# Altium PCB pcb.PcbDoc (part 2 of 2)
Units mm, origin at the board's own origin, x right, y up, seen from the top; angles counter-clockwise.
Board outline 90 x 60 mm, 2 copper layers (Top Layer, Bottom Layer); 136 components, 131 nets, 518 pads, 124 vias.
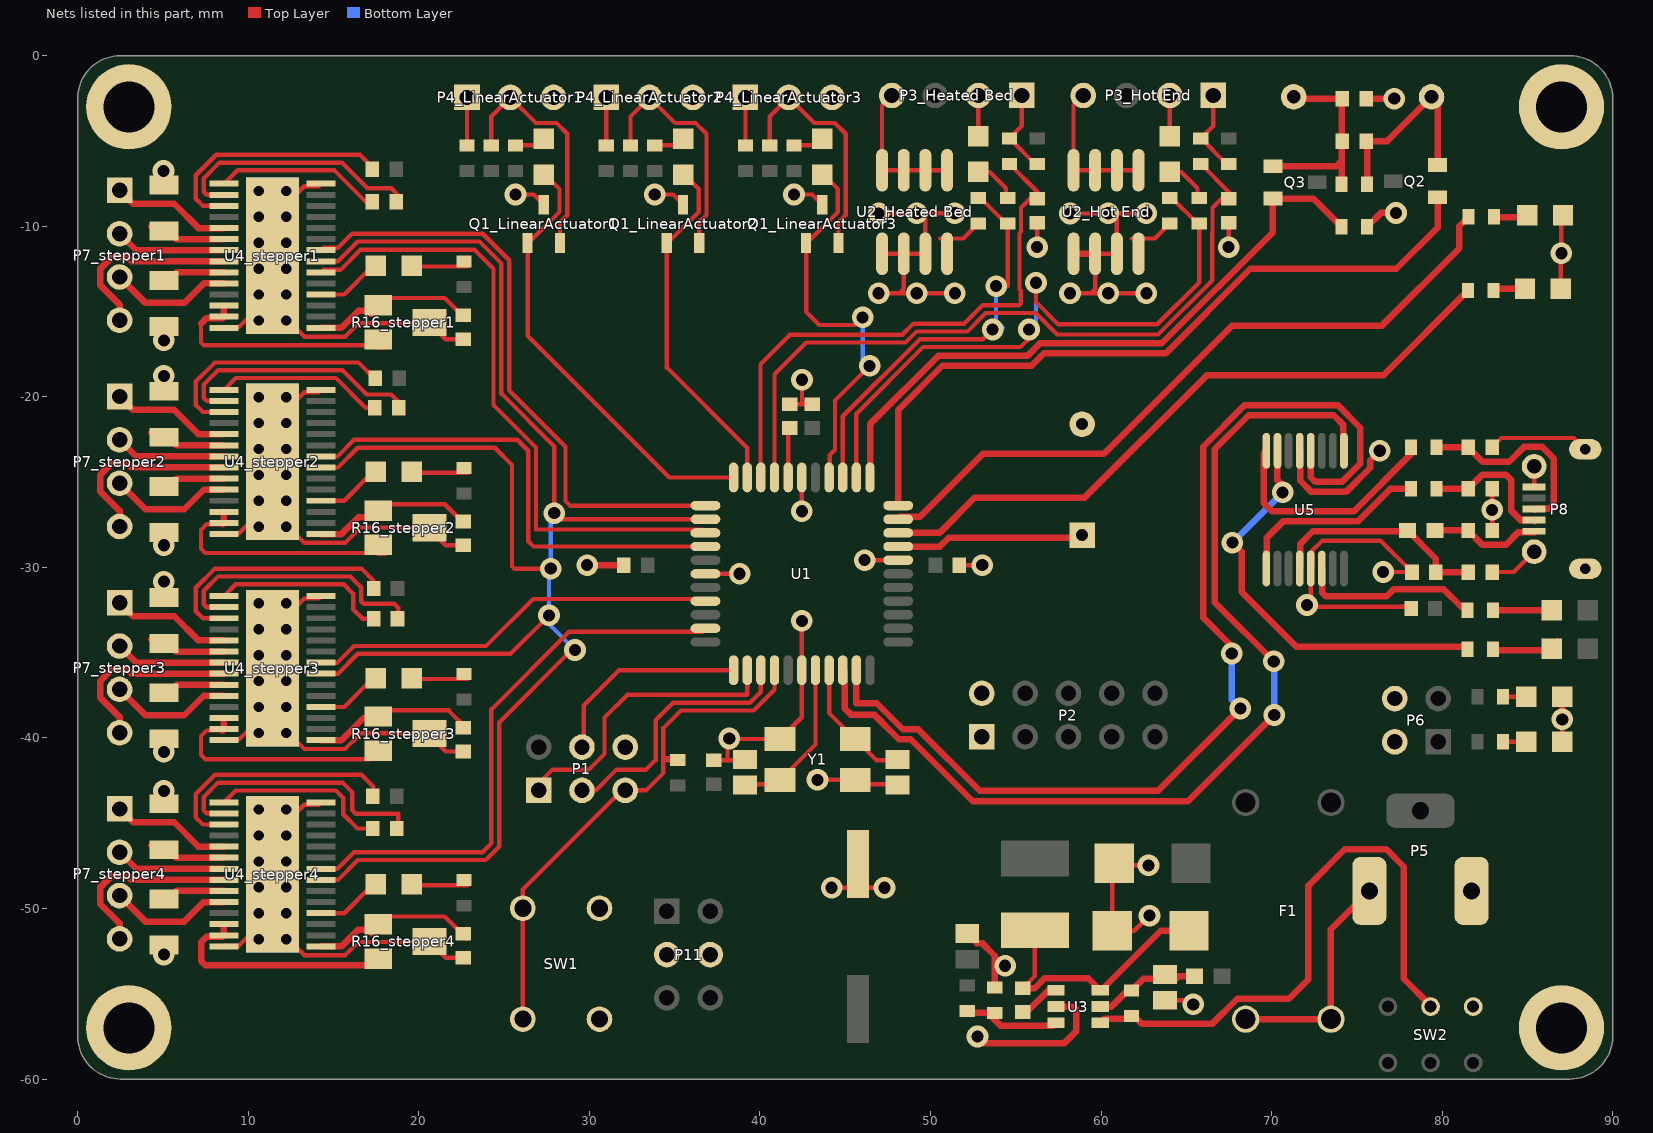
[diagram p2: the nets of this part, all layers, seen from the top]

## Via types
v1: diameter 1.27, hole 0.711, Top Layer to Bottom Layer, 76 vias
v2: diameter 1, hole 0.6, Top Layer to Bottom Layer, tented top, 48 vias

## Nets (pads, with @x,y where several pads share a name; then routed paths per layer and width w, separated by ;. In a path a pad name is that pad's centre, name@x,y a point inside that pad or via, vN(x,y) a via of type N, cw(c..) or ccw(c..) an arc to the next point about the centre after c; other vN are vias at no path point) (continued)
GND: "C8_Heated Bed.2" "C8_Hot End.2" "D3_Heated Bed.2" "D3_Hot End.2" "P3_Heated Bed.2" "P3_Hot End.2" "U2_Heated Bed.1" "U2_Heated Bed.2" "U2_Heated Bed.3" "U2_Hot End.1" "U2_Hot End.2" "U2_Hot End.3" BZ1.2 C1.1 C2.1 C3.1 C4.2 C5.2 C6.2 C7.2 C9.1 C11.1 C12.1 C14_stepper1.2 C14_stepper2.2 C14_stepper3.2 C14_stepper4.2 C16.1 C17.1 C18.1 C19.1 C20.1 C21.1 C23.2 D1.2 D2.2 D5.1 D6.1 D7.2 D8.2 P1.6 P2.1 P2.2 P4_LinearActuator1.3 P4_LinearActuator2.3 P4_LinearActuator3.3 P5.2 P6.2 P6.4 P8.5 P8.6 P11.3 P11.4 pad. Q1_LinearActuator1.3 Q1_LinearActuator2.3 Q1_LinearActuator3.3 R13.1 R16_stepper1.1 R16_stepper2.1 R16_stepper3.1 R16_stepper4.1 R18_stepper1.1 R18_stepper2.1 R18_stepper3.1 R18_stepper4.1 R19_stepper1.1 R19_stepper2.1 R19_stepper3.1 R19_stepper4.1 R25.1 SW1.1 SW2.6 U1.6 U1.18 U1.28 U1.39 U3.2 U4_stepper1.14 U4_stepper1.28 U4_stepper1.29 U4_stepper2.14 U4_stepper2.28 U4_stepper2.29 U4_stepper3.14 U4_stepper3.28 U4_stepper3.29 U4_stepper4.14 U4_stepper4.28 U4_stepper4.29 U5.5 U5.13 Y1.2 Y1.4 | length 251.9
  Top Layer w0.254: R18_stepper2.1@5.045,-19.675 5.045,-18.78 v1(5.055,-18.771) v1@5.055,-18.275 ; U4_stepper4.14@8.571,-52.225 8.619,-52.177 9.461,-52.177 U4_stepper4.29@11.421,-50.217 ; U4_stepper3.14@8.571,-40.135 8.619,-40.087 9.461,-40.087 U4_stepper3.29@11.421,-38.127 ; U4_stepper2.14@8.571,-28.044 8.619,-27.996 9.461,-27.996 U4_stepper2.29@11.421,-26.036 ; U4_stepper1.14@8.571,-15.954 8.619,-15.906 9.461,-15.906 U4_stepper1.29@11.421,-13.946 ; U4_stepper4.29@11.421,-48 U4_stepper4.29@11.421,-50.217 ; U4_stepper4.29@11.421,-45.783 13.284,-43.92 14.126,-43.92 U4_stepper4.28@14.271,-43.775 ; U4_stepper3.29@11.421,-35.91 U4_stepper3.29@11.421,-38.127 ; U4_stepper3.29@11.421,-33.693 13.284,-31.829 14.126,-31.829 U4_stepper3.28@14.271,-31.685 ; U4_stepper2.29@11.421,-23.819 U4_stepper2.29@11.421,-26.036 ; U4_stepper2.29@11.421,-21.602 13.284,-19.739 14.126,-19.739 U4_stepper2.28@14.271,-19.594 ; U4_stepper1.29@11.421,-11.729 U4_stepper1.29@11.421,-13.946 ; U4_stepper1.29@11.421,-9.512 13.284,-7.649 14.126,-7.649 U4_stepper1.28@14.271,-7.504 ; C14_stepper4.2@22.597,-52.891 21.579,-52.891 R16_stepper4.1@20.625,-51.937 20.596,-51.966 16.46,-51.966 15.68,-52.746 13.3,-52.746 11.421,-50.867 U4_stepper4.29@11.421,-50.217 ; C14_stepper3.2@22.597,-40.801 21.579,-40.801 20.504,-39.726 16.609,-39.726 15.68,-40.655 13.3,-40.655 11.421,-38.777 U4_stepper3.29@11.421,-38.127 ; C14_stepper2.2@22.597,-28.71 21.579,-28.71 20.529,-27.661 16.584,-27.661 15.68,-28.565 13.3,-28.565 11.421,-26.686 U4_stepper2.29@11.421,-26.036 ; C14_stepper1.2@22.597,-16.62 21.579,-16.62 20.625,-15.666 20.596,-15.694 16.46,-15.694 15.68,-16.475 13.3,-16.475 11.421,-14.596 U4_stepper1.29@11.421,-13.946 ; v1(25.669,-8.135) 26.736,-8.135 Q1_LinearActuator1.3@27.33,-8.73 ; v1(33.833,-8.135) 34.899,-8.135 Q1_LinearActuator2.3@35.494,-8.73 ; U1.39@36.808,-30.378 v1(38.811,-30.378) ; C6.2@37.287,-41.312 38.1,-41.312 ; v1@38.202,-40.234 38.1,-40.335 38.1,-41.312 ; v1(38.202,-40.03) 38.232,-40.061 Y1.4@41.183,-40.061 42.458,-38.786 U1.6@42.458,-36.028 v1(42.458,-33.136) ; C2.1@39.116,-41.312 38.1,-41.312 ; C3.1@41.746,-20.433 42.469,-20.433 ; v1(41.996,-8.135) 43.063,-8.135 Q1_LinearActuator3.3@43.658,-8.73 ; v1(42.458,-26.71) U1.28@42.458,-24.728 ; v1(42.469,-18.999) 42.469,-20.433 ; v1@42.977,-42.062 v1(43.375,-42.461) Y1.2@45.583,-42.461 45.835,-42.712 C1.1@48.057,-42.712 ; C4.2@43.067,-20.433 42.469,-20.433 ; v1(44.204,-48.785) v1(47.303,-48.785) ; v1(46.139,-29.578) U1.18@48.108,-29.578 ; v1(46.96,-13.927) 48.179,-13.927 ; v1(46.96,-9.253) 47.911,-9.253 ; 47.163,-11.613 48.433,-11.613 ; 47.925,-9.239 v1(49.195,-9.239) v1@49.703,-9.239 ; v1@51.227,-13.927 v1(49.195,-13.927) 48.179,-13.927 ; v1(51.43,-9.239) v1@49.703,-9.239 ; C5.2@51.692,-29.87 v1(53.035,-29.87) ; 52.802,-4.715 52.802,-2.342 ; v1(56.256,-11.222) 56.256,-9.789 ; v1(58.186,-13.927) 59.406,-13.927 ; v1(58.186,-9.253) 60.408,-9.253 v1(60.422,-9.239) v1@60.93,-9.239 ; v1@62.454,-13.927 v1(60.422,-13.927) 59.406,-13.927 ; v1(62.657,-9.239) v1@60.93,-9.239 ; v1(62.787,-47.475) 60.653,-47.475 D6.1@60.653,-51.308 61.951,-51.308 v1(62.84,-50.419) ; C12.1@63.652,-55.499 C12.1@63.743,-55.59 ; C12.1@63.743,-55.376 65.155,-55.376 v1(65.405,-55.626) ; 64.028,-4.715 64.028,-2.342 ; v1(67.483,-11.222) 67.483,-9.789 ; v1@71.972,-32.106 v1(72.074,-32.207) 72.176,-32.309 C19.1@78.181,-32.309 ; v1@72.297,-31.984 U5.13@72.297,-30.069 72.392,-29.974 72.392,-29.014 72.958,-28.448 76.402,-28.448 C21.1@78.231,-30.277 v1(76.544,-30.277) ; C20.1@82.934,-30.277 84.199,-30.277 P8.6@85.396,-29.08 ; C16.1@82.934,-27.838 v1(82.934,-26.63) C17.1@82.934,-25.4 ; C18.1@82.934,-22.962 83.477,-22.418 87.719,-22.418 P8.6@88.434,-23.134 ; P8.5@85.396,-25.28 P8.6@85.396,-24.08 ; D1.2@86.961,-13.665 v1@86.961,-11.616 ; v1@86.987,-11.591 v1(86.995,-11.582) D2.2@86.995,-9.762 ; D7.2@87.047,-40.234 v1@87.047,-39.116 ; 48.179,-13.927 48.433,-13.673 48.433,-11.613 ; 48.433,-11.613 49.703,-11.613 v1@49.703,-9.239 ; 59.406,-13.927 59.66,-13.673 59.66,-11.613 60.93,-11.613 v1@60.93,-9.239
  Top Layer w0.381: v1@5.029,-6.401 v1(5.029,-6.756) 5.045,-6.773 R18_stepper1.1@5.045,-7.585 ; R19_stepper4.1@5.045,-52.144 5.045,-52.696 v1(5.055,-52.705) ; R18_stepper4.1@5.045,-43.856 5.045,-43.113 v1(5.055,-43.104) v1@5.055,-42.723 ; R19_stepper3.1@5.045,-40.054 5.045,-40.809 v1(5.055,-40.818) v1@5.055,-41.25 ; R18_stepper3.1@5.045,-31.766 5.045,-30.845 v1(5.055,-30.836) ; R19_stepper2.1@5.045,-27.963 5.045,-28.693 v1(5.055,-28.702) v1@5.055,-29.108 ; R19_stepper1.1@5.045,-15.873 5.045,-16.679 v1(5.055,-16.688) v1@5.055,-17.094 ; v1(29.87,-29.87) C7.2@32.015,-29.87 ; C11.1@52.161,-51.472 52.717,-52.029 53.024,-52.029 53.768,-52.773 R13.1@53.768,-54.625 ; v1(52.756,-57.506) 53.162,-57.912 57.836,-57.912 58.562,-57.186 58.562,-55.932 58.384,-55.753 U3.2@57.357,-55.753 ; 58.39,-11.613 59.66,-11.613 ; U5.5@71.647,-23.169 71.679,-23.201 71.679,-24.916 72.34,-25.578 74.365,-25.578 75.789,-24.154 75.789,-23.717 v1(76.341,-23.165) ; C23.2@75.554,-2.515 v1(77.191,-2.515) ; R25.1@75.604,-10.033 76.417,-9.22 v1(77.292,-9.22) ; v1@87.047,-39.116 v1(87.047,-38.913) D8.2@87.047,-37.592
  other v1: 54.378,-53.358 51.43,-13.927 62.657,-13.927
  other v2: 10.621,-51.8 12.221,-51.8 10.621,-50.28 12.221,-50.28 10.621,-48.76 12.221,-48.76 10.621,-47.24 12.221,-47.24 10.621,-45.72 12.221,-45.72 10.621,-44.2 12.221,-44.2 10.621,-39.71 12.221,-39.71 10.621,-38.19 12.221,-38.19 10.621,-36.67 12.221,-36.67 10.621,-35.15 12.221,-35.15 10.621,-33.63 12.221,-33.63 10.621,-32.11 12.221,-32.11 10.621,-27.619 12.221,-27.619 10.621,-26.099 12.221,-26.099 10.621,-24.579 12.221,-24.579 10.621,-23.059 12.221,-23.059 10.621,-21.539 12.221,-21.539 10.621,-20.019 12.221,-20.019 10.621,-15.529 12.221,-15.529 10.621,-14.009 12.221,-14.009 10.621,-12.489 12.221,-12.489 10.621,-10.969 12.221,-10.969 10.621,-9.449 12.221,-9.449 10.621,-7.929 12.221,-7.929
NetBZ1_1: BZ1.1 U1.19 | length 11.1
  Top Layer w0.381: U1.19@48.108,-28.778 50.551,-28.778 51.072,-28.258 58.742,-28.258 BZ1.1@58.893,-28.107
NetC1_2: C1.2 U1.8 Y1.3 | length 7.7
  Top Layer w0.254: U1.8@44.058,-36.028 44.058,-38.535 Y1.3@45.583,-40.061 46.835,-41.312 C1.2@48.057,-41.312
NetC2_2: C2.2 U1.7 Y1.1 | length 9.5
  Top Layer w0.254: C2.2@39.116,-42.712 40.932,-42.712 Y1.1@41.183,-42.461 43.258,-40.386 U1.7@43.258,-36.028
NetC3_2: C3.2 U1.29 | length 2.9
  Top Layer w0.254: U1.29@41.658,-24.728 41.658,-21.922 C3.2@41.746,-21.833
"NetC8_Heated Bed_1": "C8_Heated Bed.1" "R5_Heated Bed.1" U1.31 | length 32.9
  Top Layer w0.254: U1.31@40.058,-24.728 40.03,-24.701 40.03,-18.085 41.758,-16.358 48.352,-16.358 49,-15.71 51.976,-15.71 53.056,-14.63 55.189,-14.63 55.291,-14.529 55.291,-13.781 55.22,-13.709 55.22,-10.415 55.309,-10.325 55.309,-8.918 55.838,-8.389 56.256,-8.389 ; 54.63,-6.345 56.256,-7.971 56.256,-8.35
"NetC8_Hot End_1": "C8_Hot End.1" "R5_Hot End.1" U1.30 | length 43.1
  Top Layer w0.254: U1.30@40.858,-24.728 40.858,-18.68 42.723,-16.815 48.542,-16.815 49.189,-16.167 52.166,-16.167 53.245,-15.088 56.178,-15.088 57.435,-16.345 63.347,-16.345 66.518,-13.174 66.518,-10.344 66.536,-10.325 66.536,-8.918 67.065,-8.389 67.483,-8.389 ; 65.857,-6.345 67.483,-7.971 67.483,-8.35
NetC10_1: C10.1 U3.1 | length 2.5
  Top Layer w0.381: C10.1@55.412,-56.072 55.65,-56.072 56.918,-54.803 U3.1@57.357,-54.803
NetC10_2: C10.2 D6.2 L1.1 U3.6 | length 15.4
  Top Layer w0.254: C10.2@55.412,-54.675 56.123,-53.964 L1.1@56.123,-51.274
  Top Layer w0.381: C10.2@55.412,-54.675 56.113,-54.675 56.694,-54.095 59.248,-54.095 U3.6@59.957,-54.803 60.014,-54.803 63.51,-51.308 D6.2@65.153,-51.308
NetC12_2: C12.2 FB1.1 R12.2 U3.5 | length 6.5
  Top Layer w0.381: U3.5@59.957,-55.753 60.609,-55.753 61.547,-54.816 R12.2@61.785,-54.816 62.485,-54.116 64.403,-54.116 64.262,-53.975 FB1.1@65.405,-53.975
NetC13_stepper1_1: C13_stepper1.1 U4_stepper1.3 | length 14.5
  Top Layer w0.254: U4_stepper1.3@8.571,-8.804 7.341,-8.804 6.925,-8.388 6.925,-7.011 8.125,-5.811 16.552,-5.811 17.325,-6.584 C13_stepper1.1@17.325,-6.649
NetC13_stepper2_1: C13_stepper2.1 U4_stepper2.3 | length 14.6
  Top Layer w0.254: U4_stepper2.3@8.571,-20.894 7.341,-20.894 6.925,-20.479 6.925,-19.101 8.042,-17.985 16.455,-17.985 17.388,-18.917 C13_stepper2.1@17.451,-18.917 ; C13_stepper2.1@17.325,-18.739 C13_stepper2.1@17.325,-18.674
NetC13_stepper3_1: C13_stepper3.1 U4_stepper3.3 | length 14.4
  Top Layer w0.254: U4_stepper3.3@8.571,-32.985 7.341,-32.985 6.925,-32.569 6.925,-31.192 8.042,-30.075 16.635,-30.075 17.325,-30.765 C13_stepper3.1@17.325,-30.83
NetC13_stepper4_1: C13_stepper4.1 U4_stepper4.3 | length 14.4
  Top Layer w0.254: U4_stepper4.3@8.571,-45.075 7.341,-45.075 6.925,-44.659 6.925,-43.282 8.042,-42.165 16.635,-42.165 17.325,-42.855 17.325,-42.92
NetC14_stepper1_1: C14_stepper1.1 R16_stepper1.2 U4_stepper1.15 | length 9.4
  Top Layer w0.254: R16_stepper1.2@17.625,-14.666 18.087,-14.204 21.516,-14.204 C14_stepper1.1@22.818,-15.506
  Top Layer w0.381: U4_stepper1.15@14.271,-15.954 15.464,-15.954 16.45,-14.968 17.041,-14.968 R16_stepper1.2@17.247,-15.174
NetC14_stepper2_1: C14_stepper2.1 R16_stepper2.2 U4_stepper2.15 | length 9.1
  Top Layer w0.254: R16_stepper2.2@17.625,-26.756 18.087,-26.294 21.516,-26.294 C14_stepper2.1@22.818,-27.597
  Top Layer w0.381: U4_stepper2.15@14.271,-28.044 15.464,-28.044 16.45,-27.059 R16_stepper2.2@17.041,-27.059
NetC14_stepper3_1: C14_stepper3.1 R16_stepper3.2 U4_stepper3.15 | length 9.1
  Top Layer w0.254: R16_stepper3.2@17.625,-38.847 18.087,-38.385 21.748,-38.385 22.818,-39.455 C14_stepper3.1@22.818,-39.687
  Top Layer w0.381: U4_stepper3.15@14.271,-40.135 15.464,-40.135 16.745,-38.853
NetC14_stepper4_1: C14_stepper4.1 R16_stepper4.2 U4_stepper4.15 | length 9.4
  Top Layer w0.254: R16_stepper4.2@17.625,-50.937 18.087,-50.475 21.516,-50.475 C14_stepper4.1@22.818,-51.778
  Top Layer w0.381: U4_stepper4.15@14.271,-52.225 15.464,-52.225 16.45,-51.239 17.041,-51.239 R16_stepper4.2@17.247,-51.445
NetC15_stepper1_1: C15_stepper1.1 U4_stepper1.2 | length 15
  Top Layer w0.254: U4_stepper1.2@8.571,-8.154 7.566,-8.154 7.391,-7.978 7.391,-7.192 8.315,-6.268 15.485,-6.268 16.991,-7.774 18.388,-7.774 18.787,-8.173 C15_stepper1.1@18.787,-8.554
NetC15_stepper1_2: C15_stepper1.2 U4_stepper1.1 | length 9.4
  Top Layer w0.254: U4_stepper1.1@8.571,-7.504 9.35,-6.725 15.053,-6.725 C15_stepper1.2@16.882,-8.554
NetC15_stepper2_1: C15_stepper2.1 U4_stepper2.2 | length 14.9
  Top Layer w0.254: U4_stepper2.2@8.571,-20.244 7.566,-20.244 7.391,-20.068 7.391,-19.282 8.231,-18.442 15.521,-18.442 16.943,-19.864 18.388,-19.864 18.787,-20.263 C15_stepper2.1@18.787,-20.644
NetC15_stepper2_2: C15_stepper2.2 U4_stepper2.1 | length 9.9
  Top Layer w0.254: U4_stepper2.1@8.571,-19.594 9.266,-18.899 15.137,-18.899 16.882,-20.644 C15_stepper2.2@17.426,-20.644
NetC15_stepper3_1: C15_stepper3.1 U4_stepper3.2 | length 15.4
  Top Layer w0.254: U4_stepper3.2@8.571,-32.335 7.566,-32.335 7.391,-32.159 7.391,-31.373 8.231,-30.532 15.978,-30.532 16.619,-31.173 16.619,-31.986 16.764,-32.131 18.564,-32.131 18.787,-32.354 C15_stepper3.1@18.787,-32.735
NetC15_stepper3_2: C15_stepper3.2 U4_stepper3.1 | length 10.4
  Top Layer w0.254: U4_stepper3.1@8.571,-31.685 9.266,-30.989 15.597,-30.989 16.162,-31.554 16.162,-32.469 16.707,-33.014 C15_stepper3.2@17.349,-33.014
NetC15_stepper4_1: C15_stepper4.1 U4_stepper4.2 | length 15.5
  Top Layer w0.254: U4_stepper4.2@8.571,-44.425 7.566,-44.425 7.391,-44.249 7.391,-43.463 8.231,-42.623 15.521,-42.623 16.104,-43.205 16.104,-44.247 16.301,-44.444 18.787,-44.444 18.787,-44.825
NetC15_stepper4_2: C15_stepper4.2 U4_stepper4.1 | length 10.5
  Top Layer w0.254: U4_stepper4.1@8.571,-43.775 9.266,-43.08 15.137,-43.08 15.573,-43.516 15.573,-44.481 16.399,-45.308 C15_stepper4.2@17.299,-45.308
NetC16_2: C16.2 FB2.2 P8.1 | length 6.5
  Top Layer w0.381: FB2.2@79.58,-27.838 C16.2@81.534,-27.838 81.534,-27.845 82.371,-28.682 83.728,-28.682 84.476,-27.934 P8.1@85.434,-27.934
NetC17_2: C17.2 P8.2 R21.2 | length 8.3
  Top Layer w0.381: R21.2@79.681,-25.4 C17.2@81.534,-25.4 82.14,-24.794 82.14,-24.787 82.371,-24.556 83.728,-24.556 84.063,-24.891 84.063,-26.694 84.596,-27.228 85.378,-27.228 P8.2@85.434,-27.284
NetC18_2: C18.2 P8.3 R22.2 | length 11.8
  Top Layer w0.381: R22.2@79.681,-22.962 C18.2@81.534,-22.962 81.534,-22.968 82.371,-23.805 83.93,-23.805 84.797,-22.939 85.869,-22.939 86.553,-23.623 86.553,-26.297 86.272,-26.578 85.49,-26.578 P8.3@85.434,-26.634
NetC22_1: C22.1 P9.1 Q2.2 R24.2 | length 11.5
  Top Layer w0.381: R24.2@75.604,-7.527 75.604,-5.071 C22.1@75.554,-5.021 76.773,-5.021 P9.1@79.752,-2.042 ; Q2.2@79.731,-6.406 P9.1@79.731,-2.884
NetC22_2: C22.2 C23.1 P10.1 Q3.1 R24.1 | length 11.9
  Top Layer w0.381: Q3.1@70.079,-6.476 73.8,-6.476 ; P10.1@71.298,-2.452 71.361,-2.515 C23.1@74.154,-2.515 74.104,-2.565 74.104,-6.172 ; 73.952,-6.324 74.104,-6.172 ; R24.1@74.104,-7.527 74.104,-6.172
NetD1_1: D1.1 R1.1 | length 1.9
  Top Layer w0.381: R1.1@83.021,-13.767 83.122,-13.665 D1.1@84.861,-13.665
NetD2_1: D2.1 R2.1 | length 1.9
  Top Layer w0.381: R2.1@83.122,-9.474 84.861,-9.474 D2.1@84.988,-9.347
"NetD3_Heated Bed_1": "D3_Heated Bed.1" "R7_Heated Bed.1" | length 2.6
  Top Layer w0.254: 52.802,-6.815 53.474,-6.815 54.427,-7.768 54.427,-8.339
"NetD3_Hot End_1": "D3_Hot End.1" "R7_Hot End.1" | length 2.6
  Top Layer w0.254: 64.028,-6.815 64.701,-6.815 65.654,-7.768 65.654,-8.339
NetD4_LinearActuator1_1: D4_LinearActuator1.1 R8_LinearActuator1.1 | length 1.8
  Top Layer w0.254: R8_LinearActuator1.1@25.669,-5.252 26.955,-5.252 D4_LinearActuator1.1@27.33,-4.877
NetD4_LinearActuator2_1: D4_LinearActuator2.1 R8_LinearActuator2.1 | length 1.8
  Top Layer w0.254: R8_LinearActuator2.1@33.833,-5.252 35.119,-5.252 D4_LinearActuator2.1@35.494,-4.877
NetD4_LinearActuator3_1: D4_LinearActuator3.1 R8_LinearActuator3.1 | length 1.8
  Top Layer w0.254: R8_LinearActuator3.1@41.996,-5.252 43.283,-5.252 D4_LinearActuator3.1@43.658,-4.877
NetD7_1: D7.1 R14.1 | length 1.4
  Top Layer w0.254: R14.1@83.563,-40.234 D7.1@84.947,-40.234
NetD8_1: D8.1 R15.1 | length 1.4
  Top Layer w0.254: R15.1@83.563,-37.592 D8.1@84.947,-37.592
NetD9_stepper1_1: D9_stepper1.1 R17_stepper1.1 | length 2.8
  Top Layer w0.254: D9_stepper1.1@20.057,-12.364 R17_stepper1.1@22.863,-12.364
NetD9_stepper1_2: D9_stepper1.2 U4_stepper1.18 | length 3.9
  Top Layer w0.254: U4_stepper1.18@14.271,-14.004 15.623,-14.004 17.263,-12.364 D9_stepper1.2@17.517,-12.364
NetD9_stepper2_1: D9_stepper2.1 R17_stepper2.1 | length 2.8
  Top Layer w0.254: D9_stepper2.1@20.057,-24.454 R17_stepper2.1@22.863,-24.454
NetD9_stepper2_2: D9_stepper2.2 U4_stepper2.18 | length 3.9
  Top Layer w0.254: U4_stepper2.18@14.271,-26.094 15.623,-26.094 17.263,-24.454 D9_stepper2.2@17.517,-24.454
NetD9_stepper3_1: D9_stepper3.1 R17_stepper3.1 | length 2.8
  Top Layer w0.254: D9_stepper3.1@20.057,-36.545 R17_stepper3.1@22.863,-36.545
NetD9_stepper3_2: D9_stepper3.2 U4_stepper3.18 | length 3.9
  Top Layer w0.254: U4_stepper3.18@14.271,-38.185 15.623,-38.185 17.263,-36.545 D9_stepper3.2@17.517,-36.545
NetD9_stepper4_1: D9_stepper4.1 R17_stepper4.1 | length 2.8
  Top Layer w0.254: D9_stepper4.1@20.057,-48.635 R17_stepper4.1@22.863,-48.635
NetD9_stepper4_2: D9_stepper4.2 U4_stepper4.18 | length 3.9
  Top Layer w0.254: U4_stepper4.18@14.271,-50.275 15.623,-50.275 17.263,-48.635 D9_stepper4.2@17.517,-48.635
NetD10_2: D10.2 R20.1 | length 3.5
  Top Layer w0.381: R20.1@82.831,-32.512 D10.2@86.332,-32.512
NetD11_2: D11.2 R23.1 | length 4.1
  Top Layer w0.381: R23.1@82.831,-34.849 86.23,-34.849 D11.2@86.738,-34.341
NetP1_1: P1.1 U1.2 | length 17.6
  Top Layer w0.254: P1.1@26.619,-43.078 27.838,-41.859 29.972,-41.859 30.886,-40.945 30.886,-38.811 32.22,-37.478 39.23,-37.478 39.258,-37.45 U1.2@39.258,-36.028
NetP1_3: P1.3 U1.3 | length 15.9
  Top Layer w0.254: P1.3@29.159,-43.078 30.378,-43.078 31.598,-41.859 33.325,-41.859 33.884,-41.3 33.884,-38.964 34.912,-37.935 39.42,-37.935 40.058,-37.297 U1.3@40.058,-36.028
NetP1_4: P1.4 U1.1 | length 12.3
  Top Layer w0.254: P1.4@29.159,-40.538 29.667,-40.03 29.667,-38.1 31.739,-36.028 U1.1@38.458,-36.028
NetP1_5: P1.5 R3.1 SW1.2 U1.4 | length 31.1
  Top Layer w0.254: SW1.2@26.096,-56.488 SW1.2@26.096,-49.988 26.096,-48.884 P1.5@31.902,-43.078 ; P1.5@31.699,-43.078 P1.5@31.902,-43.078 ; 34.341,-41.25 34.341,-39.421 35.369,-38.392 39.637,-38.392 40.858,-37.171 U1.4@40.858,-36.028 ; 34.404,-41.25 34.341,-41.313 34.341,-42.062 33.325,-43.078 P1.5@32.106,-43.078 P1.5@31.902,-43.078
  Top Layer w0.381: 34.404,-41.25 34.417,-41.262 R3.1@35.357,-41.262
"NetP3_Heated Bed_1": "P3_Heated Bed.1" "R4_Heated Bed.1" "R5_Heated Bed.2" | length 5.1
  Top Layer w0.254: 55.353,-2.33 55.353,-4.123 54.63,-4.845 56.13,-6.345 56.256,-6.345
"NetP3_Heated Bed_4": "P3_Heated Bed.4" "U2_Heated Bed.5" "U2_Heated Bed.6" "U2_Heated Bed.7" "U2_Heated Bed.8" | length 8.4
  Top Layer w0.254: 47.733,-2.33 47.163,-2.9 47.163,-6.713 48.433,-6.713 49.703,-6.713 50.973,-6.713
"NetP3_Hot End_1": "P3_Hot End.1" "R4_Hot End.1" "R5_Hot End.2" | length 5.1
  Top Layer w0.254: 66.58,-2.33 66.58,-4.123 65.857,-4.845 67.357,-6.345 67.483,-6.345
"NetP3_Hot End_4": "P3_Hot End.4" "U2_Hot End.5" "U2_Hot End.6" "U2_Hot End.7" "U2_Hot End.8" | length 8.4
  Top Layer w0.254: 58.96,-2.33 58.39,-2.9 58.39,-6.713 59.66,-6.713 60.93,-6.713 62.2,-6.713
NetP4_LinearActuator1_1: P4_LinearActuator1.1 R9_LinearActuator1.1 | length 2.8
  Top Layer w0.254: R9_LinearActuator1.1@22.824,-5.252 P4_LinearActuator1.1@22.824,-2.446
NetP4_LinearActuator1_2: P4_LinearActuator1.2 Q1_LinearActuator1.2 R10_LinearActuator1.1 | length 14.1
  Top Layer w0.254: R10_LinearActuator1.1@24.247,-5.252 24.247,-3.563 P4_LinearActuator1.2@25.364,-2.446 26.865,-3.947 28.067,-3.947 28.702,-4.581 28.702,-9.347 28.28,-9.769 Q1_LinearActuator1.2@28.28,-10.98
NetP4_LinearActuator2_1: P4_LinearActuator2.1 R9_LinearActuator2.1 | length 2.8
  Top Layer w0.254: R9_LinearActuator2.1@30.988,-5.252 P4_LinearActuator2.1@30.988,-2.446
NetP4_LinearActuator2_2: P4_LinearActuator2.2 Q1_LinearActuator2.2 R10_LinearActuator2.1 | length 14.1
  Top Layer w0.254: R10_LinearActuator2.1@32.41,-5.252 32.41,-3.563 P4_LinearActuator2.2@33.528,-2.446 35.029,-3.947 36.231,-3.947 36.866,-4.581 36.866,-9.347 36.444,-9.769 Q1_LinearActuator2.2@36.444,-10.98
NetP4_LinearActuator3_1: P4_LinearActuator3.1 R9_LinearActuator3.1 | length 2.8
  Top Layer w0.254: R9_LinearActuator3.1@39.152,-5.252 P4_LinearActuator3.1@39.152,-2.446
NetP4_LinearActuator3_2: P4_LinearActuator3.2 Q1_LinearActuator3.2 R10_LinearActuator3.1 | length 14.1
  Top Layer w0.254: R10_LinearActuator3.1@40.574,-5.252 40.574,-3.563 P4_LinearActuator3.2@41.692,-2.446 43.192,-3.947 44.394,-3.947 45.029,-4.581 45.029,-9.347 44.608,-9.769 Q1_LinearActuator3.2@44.608,-10.98
NetP7_stepper1_1: P7_stepper1.1 U4_stepper1.5 | length 7
  Top Layer w0.381: P7_stepper1.1@2.455,-7.893 3.242,-8.681 5.655,-8.681 7.078,-10.104 U4_stepper1.5@8.571,-10.104
NetP7_stepper1_2: P7_stepper1.2 U4_stepper1.7 | length 6.5
  Top Layer w0.381: P7_stepper1.2@2.455,-10.433 3.425,-11.404 U4_stepper1.7@8.571,-11.404
NetP7_stepper1_3: P7_stepper1.3 U4_stepper1.10 | length 7.2
  Top Layer w0.381: P7_stepper1.3@2.455,-12.973 3.979,-14.497 6.239,-14.497 7.383,-13.354 U4_stepper1.10@8.571,-13.354
NetP7_stepper1_4: P7_stepper1.4 U4_stepper1.8 | length 11.1
  Top Layer w0.381: P7_stepper1.4@2.455,-15.513 2.455,-14.591 1.311,-13.447 1.311,-12.5 1.981,-11.83 2.928,-11.83 3.152,-12.054 U4_stepper1.8@8.571,-12.054
NetP7_stepper2_1: P7_stepper2.1 U4_stepper2.5 | length 7
  Top Layer w0.381: P7_stepper2.1@2.455,-19.984 3.242,-20.771 5.655,-20.771 7.078,-22.194 U4_stepper2.5@8.571,-22.194
NetP7_stepper2_2: P7_stepper2.2 U4_stepper2.7 | length 6.5
  Top Layer w0.381: P7_stepper2.2@2.455,-22.524 3.425,-23.494 U4_stepper2.7@8.571,-23.494
NetP7_stepper2_3: P7_stepper2.3 U4_stepper2.10 | length 7.2
  Top Layer w0.381: P7_stepper2.3@2.455,-25.064 3.979,-26.588 6.239,-26.588 7.383,-25.444 U4_stepper2.10@8.571,-25.444
NetP7_stepper2_4: P7_stepper2.4 U4_stepper2.8 | length 11.1
  Top Layer w0.381: P7_stepper2.4@2.455,-27.604 2.455,-26.681 1.311,-25.538 1.311,-24.59 1.981,-23.92 2.928,-23.92 3.152,-24.144 U4_stepper2.8@8.571,-24.144
NetP7_stepper3_1: P7_stepper3.1 U4_stepper3.5 | length 7
  Top Layer w0.381: P7_stepper3.1@2.455,-32.074 3.242,-32.862 5.655,-32.862 7.078,-34.285 U4_stepper3.5@8.571,-34.285
NetP7_stepper3_2: P7_stepper3.2 U4_stepper3.7 | length 6.5
  Top Layer w0.381: P7_stepper3.2@2.455,-34.614 3.425,-35.585 U4_stepper3.7@8.571,-35.585
NetP7_stepper3_3: P7_stepper3.3 U4_stepper3.10 | length 7.2
  Top Layer w0.381: P7_stepper3.3@2.455,-37.154 3.979,-38.678 6.239,-38.678 7.383,-37.535 U4_stepper3.10@8.571,-37.535
NetP7_stepper3_4: P7_stepper3.4 U4_stepper3.8 | length 11.1
  Top Layer w0.381: P7_stepper3.4@2.455,-39.694 2.455,-38.772 1.311,-37.628 1.311,-36.68 1.981,-36.01 2.928,-36.01 3.152,-36.235 U4_stepper3.8@8.571,-36.235
NetP7_stepper4_1: P7_stepper4.1 U4_stepper4.5 | length 7
  Top Layer w0.381: P7_stepper4.1@2.455,-44.165 3.242,-44.952 5.655,-44.952 7.078,-46.375 U4_stepper4.5@8.571,-46.375
NetP7_stepper4_2: P7_stepper4.2 U4_stepper4.7 | length 6.5
  Top Layer w0.381: P7_stepper4.2@2.455,-46.705 3.425,-47.675 U4_stepper4.7@8.571,-47.675
NetP7_stepper4_3: P7_stepper4.3 U4_stepper4.10 | length 7.2
  Top Layer w0.381: P7_stepper4.3@2.455,-49.245 3.979,-50.769 6.239,-50.769 7.383,-49.625 U4_stepper4.10@8.571,-49.625
NetP7_stepper4_4: P7_stepper4.4 U4_stepper4.8 | length 11.1
  Top Layer w0.381: P7_stepper4.4@2.455,-51.785 2.455,-50.862 1.311,-49.718 1.311,-48.771 1.981,-48.101 2.928,-48.101 3.152,-48.325 U4_stepper4.8@8.571,-48.325
NetQ2_1: Q2.1 U1.22 | length 43.4
  Top Layer w0.381: U1.22@48.108,-26.378 48.108,-20.777 50.698,-18.186 55.926,-18.186 56.662,-17.45 63.805,-17.45 68.758,-12.497 77.318,-12.497 79.731,-10.084 Q2.1@79.731,-8.306
NetQ3_2: Q3.2 R25.2 U1.23 | length 38.1
  Top Layer w0.381: U1.23@46.458,-24.728 46.458,-21.601 50.456,-17.602 55.684,-17.602 56.42,-16.866 63.563,-16.866 70.079,-10.35 Q3.2@70.079,-8.376 72.447,-8.376 R25.2@74.104,-10.033
NetR1_2: R1.2 U1.20 | length 39.3
  Top Layer w0.381: U1.20@48.108,-27.978 50.525,-27.978 52.595,-25.908 59.034,-25.908 66.197,-18.745 76.542,-18.745 R1.2@81.521,-13.767
NetR2_2: R2.2 U1.21 | length 41.5
  Top Layer w0.381: U1.21@48.108,-27.178 48.239,-27.047 49.376,-27.047 53.081,-23.343 60.173,-23.343 67.691,-15.824 76.479,-15.824 81.001,-11.303 81.001,-9.994 R2.2@81.546,-9.449
"NetR6_Heated Bed_1": "R6_Heated Bed.1" "U2_Heated Bed.4" | length 2.6
  Top Layer w0.254: 50.582,-10.714 51.926,-10.714 52.802,-9.839 ; 50.973,-11.613 50.988,-11.629
"NetR6_Heated Bed_2": "R6_Heated Bed.2" "R7_Heated Bed.2" U1.25 | length 24.3
  Top Layer w0.254: U1.25@44.858,-24.728 44.858,-21.145 49.379,-16.624 53.073,-16.624 v1(53.645,-16.053) ; 52.802,-8.339 52.927,-8.339 54.427,-9.839 ; v1(53.848,-13.513) 54.508,-13.513 54.529,-13.492 54.529,-9.839
  Bottom Layer w0.254: v1(53.645,-16.053) 53.746,-15.951 54.254,-15.951 53.848,-15.545 v1(53.848,-13.513)
"NetR6_Hot End_1": "R6_Hot End.1" "U2_Hot End.4" | length 2.6
  Top Layer w0.254: 61.809,-10.714 63.153,-10.714 64.028,-9.839 ; 62.2,-11.613 62.215,-11.629
"NetR6_Hot End_2": "R6_Hot End.2" "R7_Hot End.2" U1.24 | length 37.7
  Top Layer w0.254: U1.24@45.658,-24.728 45.658,-20.992 49.568,-17.081 55.283,-17.081 55.905,-16.459 55.778,-16.459 v1(55.778,-16.053) ; v1(56.185,-13.31) 56.185,-14.448 57.485,-15.748 63.297,-15.748 65.756,-13.29 65.756,-9.839 ; 64.028,-8.339 64.154,-8.339 65.654,-9.839
  Bottom Layer w0.254: v1@56.083,-15.748 v1(55.778,-16.053) 56.185,-15.646 v1(56.185,-13.31)
NetR11_1: R11.1 R13.2 U3.3 | length 5.6
  Top Layer w0.381: R11.1@52.161,-56.125 53.362,-56.125 54.106,-56.869 57.191,-56.869 U3.3@57.357,-56.703
NetR12_1: R12.1 SW2.5 U3.4 | length 34.6
  Top Layer w0.381: U3.4@60.198,-56.462 61.639,-56.462 R12.1@61.785,-56.316 61.954,-56.316 62.408,-56.769 66.515,-56.769 67.988,-55.296 71.018,-55.296 72.161,-54.153 72.161,-48.666 74.295,-46.533 76.733,-46.533 77.749,-47.549 77.749,-54.128 SW2.5@79.375,-55.754
NetR16_stepper1_3: R16_stepper1.3 U4_stepper1.12 U4_stepper1.13 | length 14.4
  Top Layer w0.254: 7.23,-15.713 7.23,-16.809 7.388,-16.967 16.911,-16.967 17.007,-17.063 R16_stepper1.3@17.609,-17.063
  Top Layer w0.381: 7.23,-15.713 7.558,-15.385 8.489,-15.385 U4_stepper1.13@8.571,-15.304 U4_stepper1.12@8.571,-14.654 ; R16_stepper1.3@17.609,-17.063 R16_stepper1.3@17.879,-16.793 ; R16_stepper1.3@17.752,-17.047 R16_stepper1.3@18.006,-17.047
NetR16_stepper2_3: R16_stepper2.3 U4_stepper2.12 U4_stepper2.13 | length 14.4
  Top Layer w0.254: U4_stepper2.13@8.489,-27.476 7.558,-27.476 7.23,-27.803 7.23,-28.899 7.484,-29.153 R16_stepper2.3@17.609,-29.153
  Top Layer w0.381: U4_stepper2.13@8.489,-27.476 U4_stepper2.13@8.571,-27.394 U4_stepper2.12@8.571,-26.744 ; R16_stepper2.3@17.609,-29.153 R16_stepper2.3@17.879,-28.883 ; R16_stepper2.3@17.752,-29.137 R16_stepper2.3@18.006,-29.137
NetR16_stepper3_3: R16_stepper3.3 U4_stepper3.12 U4_stepper3.13 | length 14
  Top Layer w0.254: U4_stepper3.13@8.489,-39.566 7.558,-39.566 7.23,-39.894 7.23,-40.99 7.484,-41.244 17.126,-41.244 R16_stepper3.3@17.625,-40.745
  Top Layer w0.381: U4_stepper3.13@8.489,-39.566 U4_stepper3.13@8.571,-39.485 U4_stepper3.12@8.571,-38.835
NetR16_stepper4_3: R16_stepper4.3 U4_stepper4.12 U4_stepper4.13 | length 14.4
  Top Layer w0.381: U4_stepper4.12@8.571,-50.925 U4_stepper4.13@8.571,-51.575 8.489,-51.656 7.558,-51.656 7.23,-51.984 7.23,-53.08 7.484,-53.334 17.609,-53.334 R16_stepper4.3@17.879,-53.064 ; R16_stepper4.3@17.752,-53.318 R16_stepper4.3@18.006,-53.318
NetR18_stepper1_2: R18_stepper1.2 U4_stepper1.6 | length 4.6
  Top Layer w0.381: R18_stepper1.2@4.309,-10.031 5.045,-10.031 5.768,-10.754 U4_stepper1.6@8.571,-10.754
NetR18_stepper2_2: R18_stepper2.2 U4_stepper2.6 | length 4.6
  Top Layer w0.381: R18_stepper2.2@4.309,-22.121 5.045,-22.121 5.768,-22.844 U4_stepper2.6@8.571,-22.844
NetR18_stepper3_2: R18_stepper3.2 U4_stepper3.6 | length 4.6
  Top Layer w0.381: R18_stepper3.2@4.309,-34.212 5.045,-34.212 5.768,-34.935 U4_stepper3.6@8.571,-34.935
NetR18_stepper4_2: R18_stepper4.2 U4_stepper4.6 | length 4.6
  Top Layer w0.381: R18_stepper4.2@4.309,-46.302 5.045,-46.302 5.768,-47.025 U4_stepper4.6@8.571,-47.025
NetR19_stepper1_2: R19_stepper1.2 U4_stepper1.9 | length 3.4
  Top Layer w0.381: R19_stepper1.2@5.325,-13.173 5.794,-12.704 U4_stepper1.9@8.571,-12.704
NetR19_stepper2_2: R19_stepper2.2 U4_stepper2.9 | length 3.4
  Top Layer w0.381: R19_stepper2.2@5.325,-25.263 5.794,-24.794 U4_stepper2.9@8.571,-24.794
NetR19_stepper3_2: R19_stepper3.2 U4_stepper3.9 | length 3.4
  Top Layer w0.381: R19_stepper3.2@5.325,-37.354 5.794,-36.885 U4_stepper3.9@8.571,-36.885
NetR19_stepper4_2: R19_stepper4.2 U4_stepper4.9 | length 3.4
  Top Layer w0.381: R19_stepper4.2@5.325,-49.444 5.794,-48.975 U4_stepper4.9@8.571,-48.975
NetR20_2: R20.2 U5.14 | length 10.5
  Top Layer w0.381: U5.14@72.947,-30.069 72.979,-30.101 72.979,-31.486 73.192,-31.699 76.748,-31.699 77.154,-31.293 80.101,-31.293 81.117,-32.309 R20.2@81.331,-32.309
NetR21_1: R21.1 U5.9 | length 11.6
  Top Layer w0.254: U5.9@69.729,-30.038 U5.9@69.792,-29.974
  Top Layer w0.381: U5.9@69.697,-30.069 69.729,-30.038 69.729,-28.253 70.677,-27.305 75.059,-27.305 76.964,-25.4 R21.1@78.181,-25.4
NetR22_1: R22.1 U5.8 | length 13.8
  Top Layer w0.381: U5.8@69.697,-23.169 69.534,-23.333 69.534,-26.213 70.042,-26.721 74.817,-26.721 78.181,-23.357 R22.1@78.181,-22.962
NetR23_2: R23.2 U5.7 | length 24.4
  Top Layer w0.381: v1(67.705,-28.55) 68.239,-29.083 68.239,-31.433 71.451,-34.646 R23.2@81.331,-34.646 ; U5.7@70.347,-23.169 70.347,-24.893 v1@70.855,-25.4
  Bottom Layer w0.381: v1(67.705,-28.55) v1@70.855,-25.4
  other v1: 70.652,-25.603
NetU1_9: U1.9 U5.1 | length 59
  Top Layer w0.381: U1.9@44.858,-36.028 44.989,-36.16 44.989,-38.283 45.339,-38.633 46.691,-38.633 48.139,-40.081 48.844,-40.081 52.476,-43.713 65.1,-43.713 v1(70.155,-38.659) ; v1(70.129,-35.509) 66.676,-32.056 66.676,-23.064 68.658,-21.082 73.649,-21.082 74.216,-21.649 74.216,-23.138 U5.1@74.247,-23.169
  Bottom Layer w0.381: v1(70.129,-35.509) 70.155,-35.535 v1(70.155,-38.659)
NetU1_10: U1.10 U5.4 | length 62.7
  Top Layer w0.381: U1.10@45.658,-36.028 45.658,-37.973 46.857,-37.973 48.381,-39.497 49.276,-39.497 52.883,-43.104 63.348,-43.104 v1(68.174,-38.278) ; v1(67.666,-35.052) 67.666,-34.62 65.989,-32.944 65.989,-22.925 68.416,-20.498 73.891,-20.498 75.205,-21.812 75.205,-23.912 74.123,-24.994 72.582,-24.994 72.297,-24.709 U5.4@72.297,-23.169
  Bottom Layer w0.381: v1(67.666,-35.052) 67.666,-37.77 v1(68.174,-38.278)
NetU1_34: U1.34 U4_stepper1.22 | length 35.9
  Top Layer w0.254: U4_stepper1.22@14.271,-11.404 14.416,-11.259 15.258,-11.259 16.083,-10.433 23.743,-10.433 25.298,-11.989 25.298,-19.623 28.6,-22.925 28.6,-26.111 28.868,-26.378 U1.34@36.808,-26.378
NetU1_35: U1.35 U4_stepper1.21 U4_stepper2.21 U4_stepper3.21 U4_stepper4.21 | length 105
  Top Layer w0.254: U4_stepper4.21@14.271,-48.325 15.261,-48.325 16.425,-47.162 23.921,-47.162 24.714,-46.369 24.714,-39.091 28.956,-34.849 v1(29.159,-34.849) ; U4_stepper3.21@14.271,-36.235 15.261,-36.235 16.425,-35.071 25.381,-35.071 v1(27.635,-32.817) ; U4_stepper2.21@14.271,-24.144 15.261,-24.144 16.425,-22.981 24.456,-22.981 25.467,-23.992 25.467,-29.937 25.603,-30.074 v1(27.737,-30.074) ; U4_stepper1.21@14.271,-12.054 15.261,-12.054 16.425,-10.891 23.554,-10.891 24.841,-12.178 24.841,-19.812 27.943,-22.913 v1(27.943,-26.818) 28.038,-26.818 28.398,-27.178 U1.35@36.808,-27.178
  Bottom Layer w0.254: v1@27.635,-30.277 v1(27.635,-32.817) 27.635,-33.325 v1(29.159,-34.849) ; v1(27.737,-30.074) 27.737,-27.024 v1(27.943,-26.818)
NetU1_36: U1.36 U4_stepper1.20 | length 37.2
  Top Layer w0.254: U4_stepper1.20@14.271,-12.704 14.416,-12.559 15.403,-12.559 16.579,-11.383 23.27,-11.383 24.384,-12.497 24.384,-20.486 26.873,-22.975 26.873,-27.784 U1.36@36.613,-27.784
STEP1: U1.37 U4_stepper2.22 | length 28.6
  Top Layer w0.254: U4_stepper2.22@14.271,-23.494 15.226,-23.494 16.196,-22.524 25.775,-22.524 26.416,-23.165 26.416,-28.474 26.721,-28.778 U1.37@36.808,-28.778
STEP2: U1.41 U4_stepper3.22 | length 24.1
  Top Layer w0.254: U4_stepper3.22@14.271,-35.585 15.226,-35.585 16.196,-34.614 23.943,-34.614 26.706,-31.852 36.681,-31.852 U1.41@36.808,-31.978
STEP3: U1.43 U4_stepper4.22 | length 33
  Top Layer w0.254: U4_stepper4.22@14.271,-47.675 15.226,-47.675 16.196,-46.705 23.732,-46.705 24.257,-46.179 24.257,-38.329 28.812,-33.773 36.613,-33.773 U1.43@36.808,-33.578
STOP1: D4_LinearActuator1.2 Q1_LinearActuator1.1 U1.33 | length 26.2
  Top Layer w0.254: D4_LinearActuator1.2@27.33,-6.977 27.398,-6.977 28.245,-7.823 28.245,-9.158 26.422,-10.98 Q1_LinearActuator1.1@26.38,-10.98 26.38,-16.424 34.685,-24.728 U1.33@38.458,-24.728
STOP2: D4_LinearActuator2.2 Q1_LinearActuator2.1 U1.32 | length 20.9
  Top Layer w0.254: D4_LinearActuator2.2@35.494,-6.977 35.562,-6.977 36.408,-7.823 36.408,-9.158 34.586,-10.98 Q1_LinearActuator2.1@34.544,-10.98 34.544,-18.288 39.258,-23.002 U1.32@39.258,-24.728
STOP3: D4_LinearActuator3.2 Q1_LinearActuator3.1 U1.26 | length 23.6
  Top Layer w0.254: D4_LinearActuator3.2@43.658,-6.977 43.726,-6.977 44.572,-7.823 44.572,-9.158 42.75,-10.98 Q1_LinearActuator3.1@42.708,-10.98 42.708,-15.013 43.485,-15.79 45.577,-15.79 v1@45.923,-15.443 ; U1.26@44.058,-24.728 44.252,-24.534 44.094,-24.376 44.094,-23.413 44.399,-23.108 44.399,-20.218 v1(46.431,-18.186)
  Bottom Layer w0.254: v1(46.025,-15.342) 46.025,-17.78 v1(46.431,-18.186)
VCC: C20.2 C21.2 FB2.1 U5.12 | length 13.1
  Top Layer w0.381: U5.12@71.647,-30.069 71.679,-30.038 71.679,-28.625 72.414,-27.889 77.929,-27.889 FB2.1@77.98,-27.838 79.631,-29.49 C21.2@79.631,-30.277 C20.2@81.534,-30.277
VIN: F1.1 P5.1 | length 13.5
  Top Layer w0.381: F1.1@68.482,-56.49 F1.1@73.482,-56.49 73.482,-51.222 P5.1@75.733,-48.971
pads on no net: P5.3 P8.4 SW2.1 SW2.2 SW2.3 SW2.4 U4_stepper1.19 U4_stepper1.23 U4_stepper1.27 U4_stepper2.19 U4_stepper2.23 U4_stepper2.27 U4_stepper3.19 U4_stepper3.23 U4_stepper3.27 U4_stepper4.19 U4_stepper4.23 U4_stepper4.27 U5.2 U5.6 U5.15 U5.16

## Polygon pours and split planes (outlines as drawn)
VIN on Top Layer "Top Layer-No Net" (solid, remove dead copper, pour order 26): 68.482,-56.49 73.508,-56.49 73.66,-56.642 76.708,-53.594 76.708,-46.863 74.803,-46.863 74.676,-46.99 73.972,-47.694 72.567,-47.694 72.567,-53.748 71.374,-54.94 70.815,-55.499 68.199,-55.499
+3.3V on Top Layer "Top Layer-No Net" (solid, remove dead copper, pour order 24): 3.311,-0.506 85.777,-0.506 85.903,-0.381 89.515,-3.963 89.527,-3.963 89.527,-56.38 89.535,-56.388 86.648,-59.251 85.465,-59.251 1.738,-59.251 -0.381,-57.15 -0.253,-57.023 -0.253,-2.667
GND on Top Layer "Top Layer-No Net" (solid, remove dead copper, pour order 20): 51.43,-9.239 46.973,-9.239 46.96,-9.253 46.96,-13.927 51.43,-13.927
GND on Top Layer "Top Layer-No Net" (solid, remove dead copper, pour order 18): 58.186,-9.253 62.643,-9.253 62.657,-9.239 62.657,-13.927 58.186,-13.927
"NetP3_Heated Bed_4" on Top Layer "Top Layer-No Net" (solid, remove dead copper, pour order 14): 51.181,-7.747 51.054,-7.874 46.99,-7.874 46.99,-2.286 47.244,-2.032 47.498,-1.778 48.133,-1.778 48.133,-1.905 48.387,-2.159 51.054,-4.826 51.054,-5.588
"NetP3_Hot End_4" on Top Layer "Top Layer-No Net" (solid, remove dead copper, pour order 12): 62.357,-7.747 58.42,-7.747 58.127,-7.454 58.127,-1.849 58.761,-1.849 59.209,-1.401 59.792,-1.984 59.849,-1.984 59.849,-2.898 62.2,-5.249
+24V on Top Layer "Top Layer-No Net" (solid, remove dead copper, pour order 8): 89.455,-0.775 90.096,-1.421 90.096,-58.648 89.712,-58.648 88.302,-60.069 88.174,-60.198 1.666,-60.198 1.666,-59.294 0.256,-57.873 0,-57.614 0,-0.775 0.769,-0.775 1.538,0 88.302,0
GND on Bottom Layer "Top Layer-No Net" (solid, remove dead copper, pour order 10): 1.521,-59.056 0.381,-57.915 0.381,-57.155 0.381,-2.028 1.901,-0.507 2.154,-0.254 5.573,-0.254 87.888,-0.254 88.015,-0.381 89.155,-1.521 89.408,-1.521 89.408,-58.422 88.395,-59.436 88.142,-59.436 1.647,-59.436 1.521,-59.309

## Keep-outs
Keep-Out Layer:
  the board outline again, w0.254

## Other copper
Top Layer:
  region net +24V: 16.887,-17.59 16.707,-17.59 16.645,-17.527

## Silkscreen, mask and mechanical layers (free items; w line width, h text height)
Top Overlay:
  drawing of 2 lines, arcs and shapes, not listed
  text "Cap Sense" at 81.026,-1.651 h0.76 r270
  text "V2 B1" at 8.636,-3.683 h1.52
  text "Z" at 39.964,-9.633 h1.52 r180
  text "Y" at 31.369,-9.652 h1.52 r180
  text "X" at 24.257,-9.779 h1.52 r180
  text "X" at 4.572,-11.176 h1.52 r270
  text "Extr" at 51.689,-13.589 h1.52 r180
  text "Bed" at 62.611,-13.589 h1.52 r180
  text "OpenHardware" at 23.181,-23.083 h1.52
  text "Y" at 4.699,-23.368 h1.52 r270
  text "EXT" at 56.261,-35.052 h1.52
  text "Z" at 4.445,-35.433 h1.52 r270
  text "3.3V" at 89.281,-38.608 h0.76 r90
  text "ISP" at 27.559,-38.735 h1.52
  text "24V" at 89.281,-41.402 h0.76 r90
  text "E" at 4.318,-47.498 h1.52 r270
  text "3.3V" at 34.671,-48.26 h0.76
  text "Keith Brown" at 6.223,-56.134 h1.52
  text "24V" at 34.925,-57.912 h0.76
  text "Deltabot 2013" at 6.223,-59.055 h1.52
Bottom Overlay:
  region: 927 vertices and 1 holes, not listed, extent 21.514,-49.378 67.64,-9.347
  text "Printed-Robotics.com" at 73.787,-54.737 h3.05

## Text inside footprints (layer, text, board x,y; h text height)
F1: Mechanical 1 "Holder" at 72.582,-53.19 h0.76 r90
P1: Top Overlay "1" at 24.994,-43.586 h0.76